# Altium PCB EtherWiz.PcbDoc (part 1 of 2)
Units mm, origin at the board's own origin, x right, y up, seen from the top; angles counter-clockwise.
Board outline 160 x 100 mm, 4 copper layers (Top Layer, GND, 5V, Bottom Layer), stack 1.741 mm thick; 68 components, 149 nets, 452 pads, 231 vias.
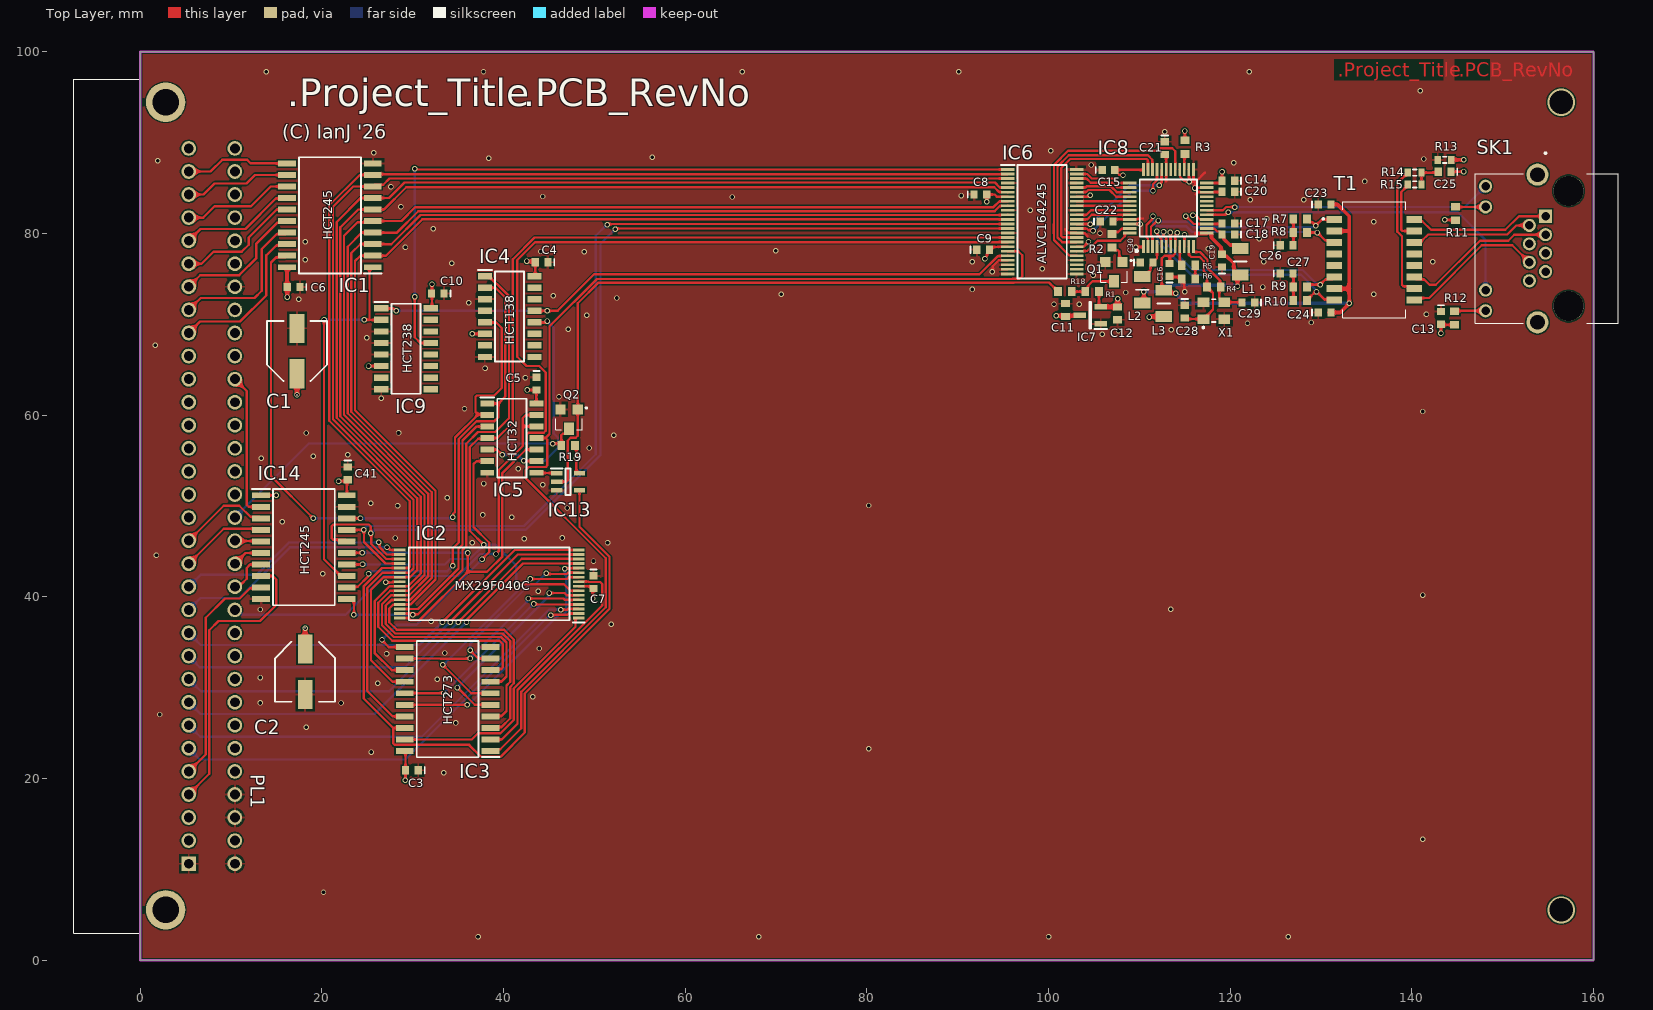
[diagram p0: Top Layer view]
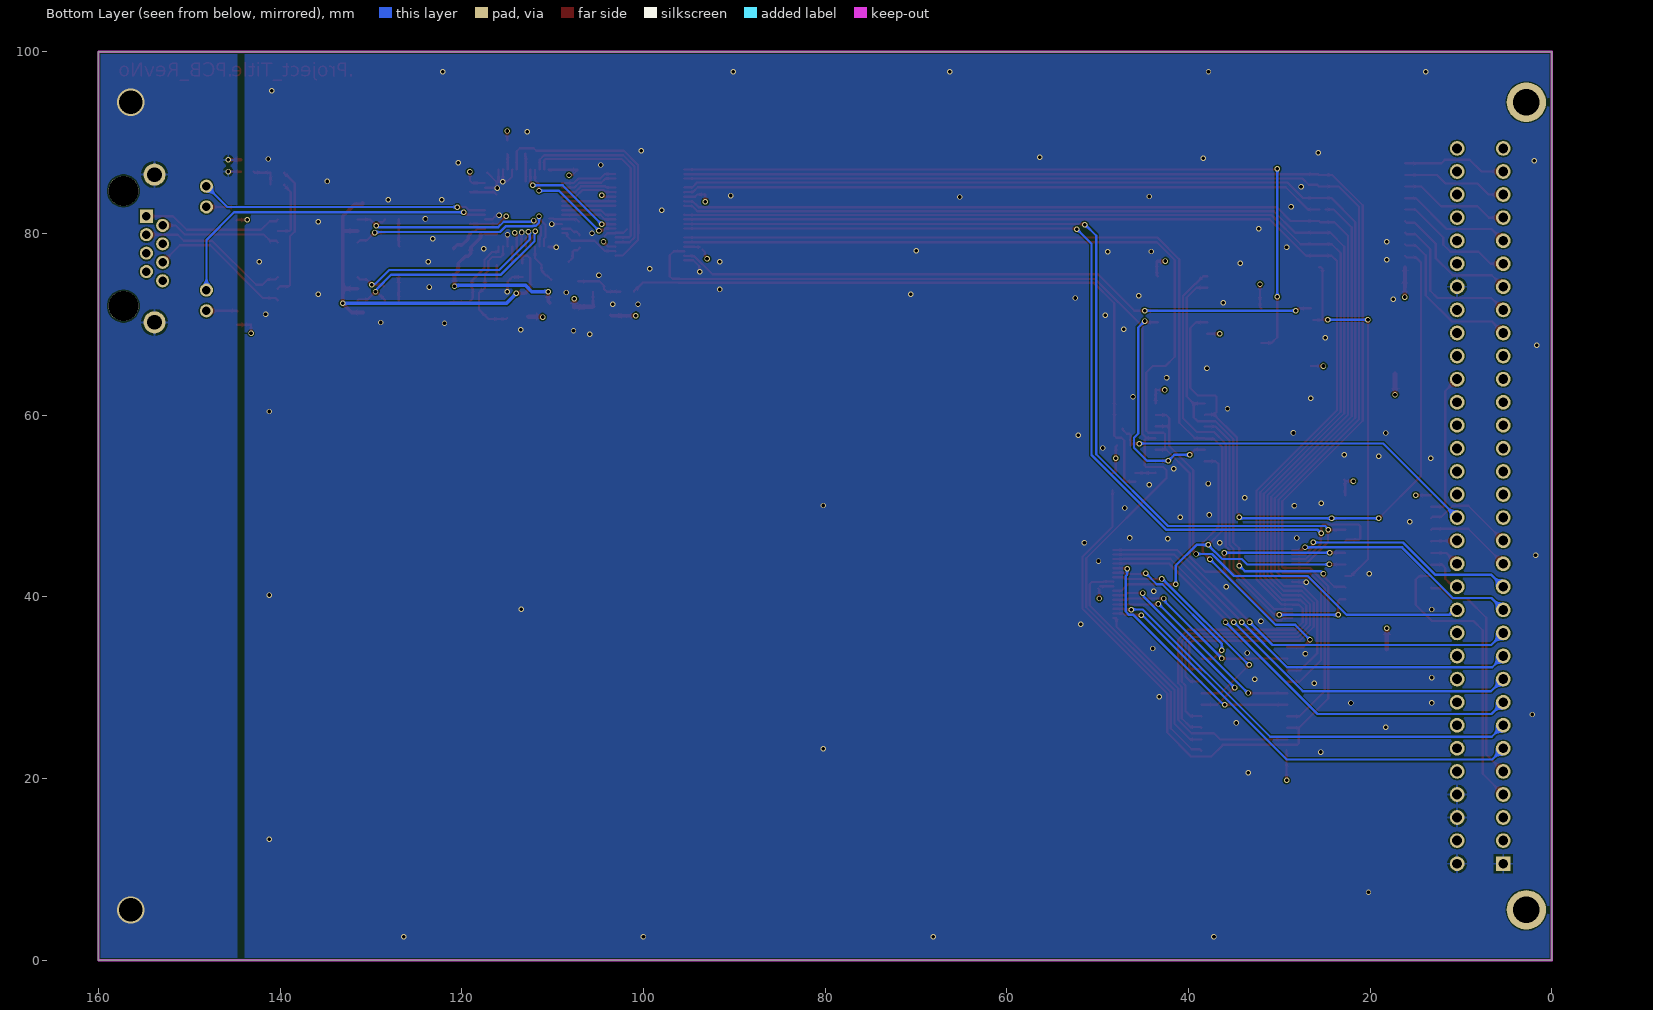
[diagram p1: Bottom Layer view, seen from below]
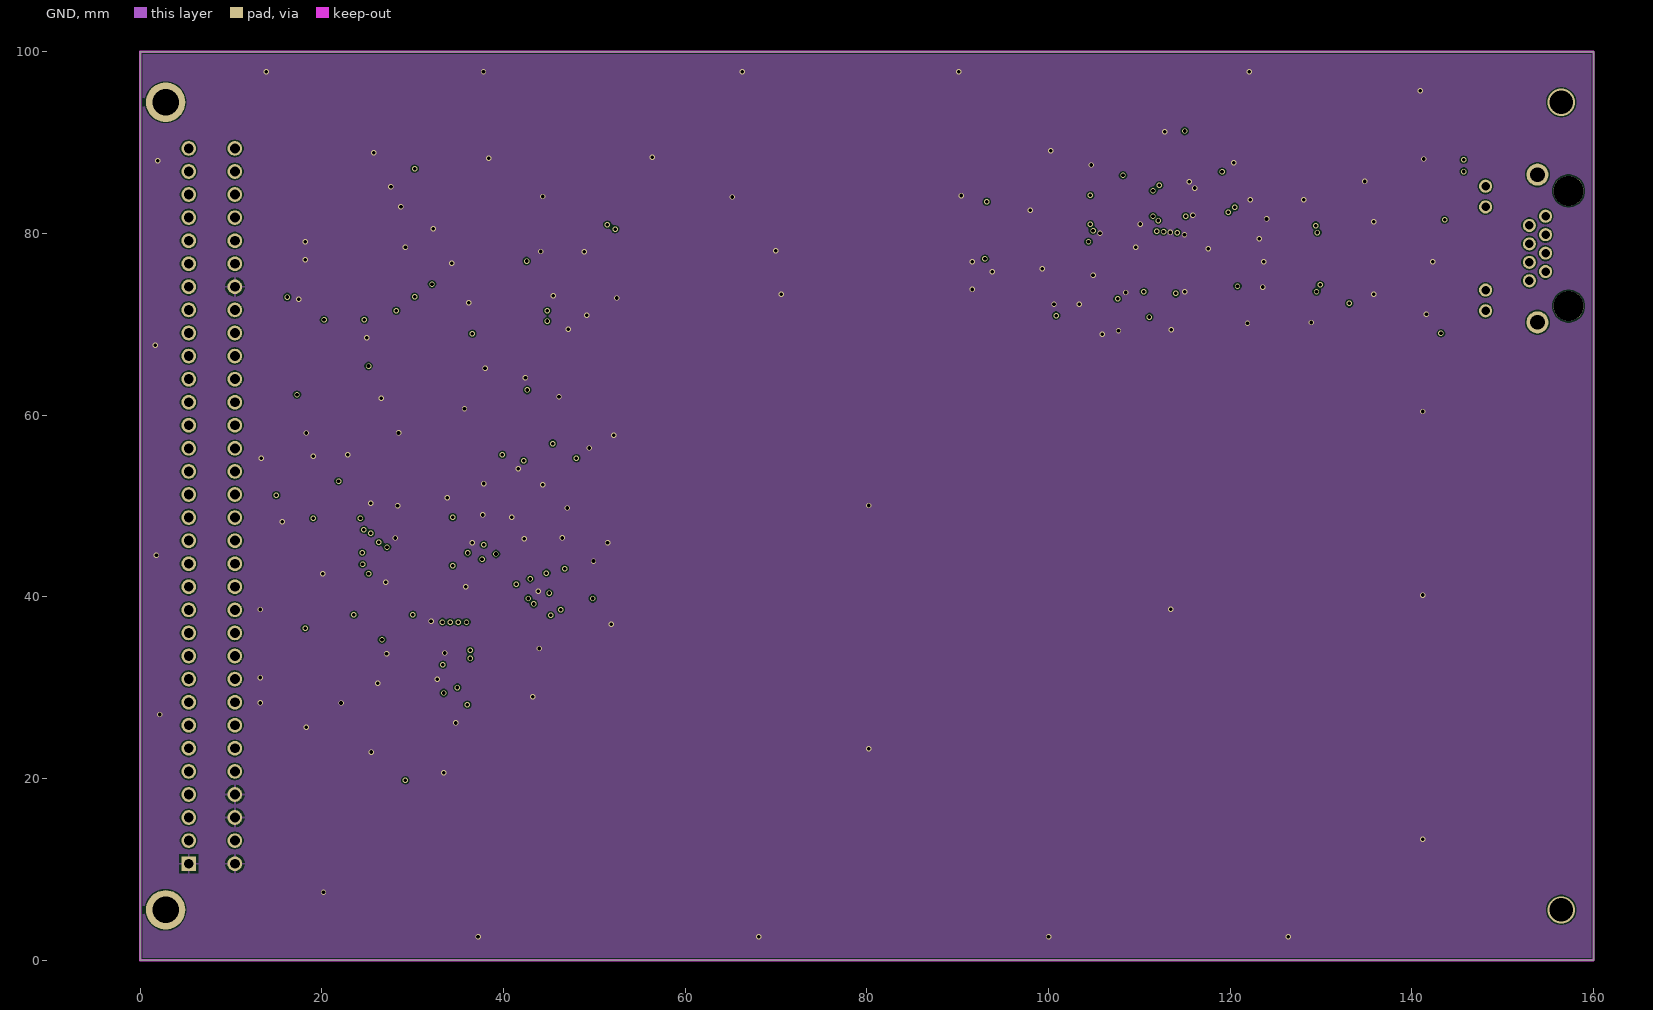
[diagram p2: GND]
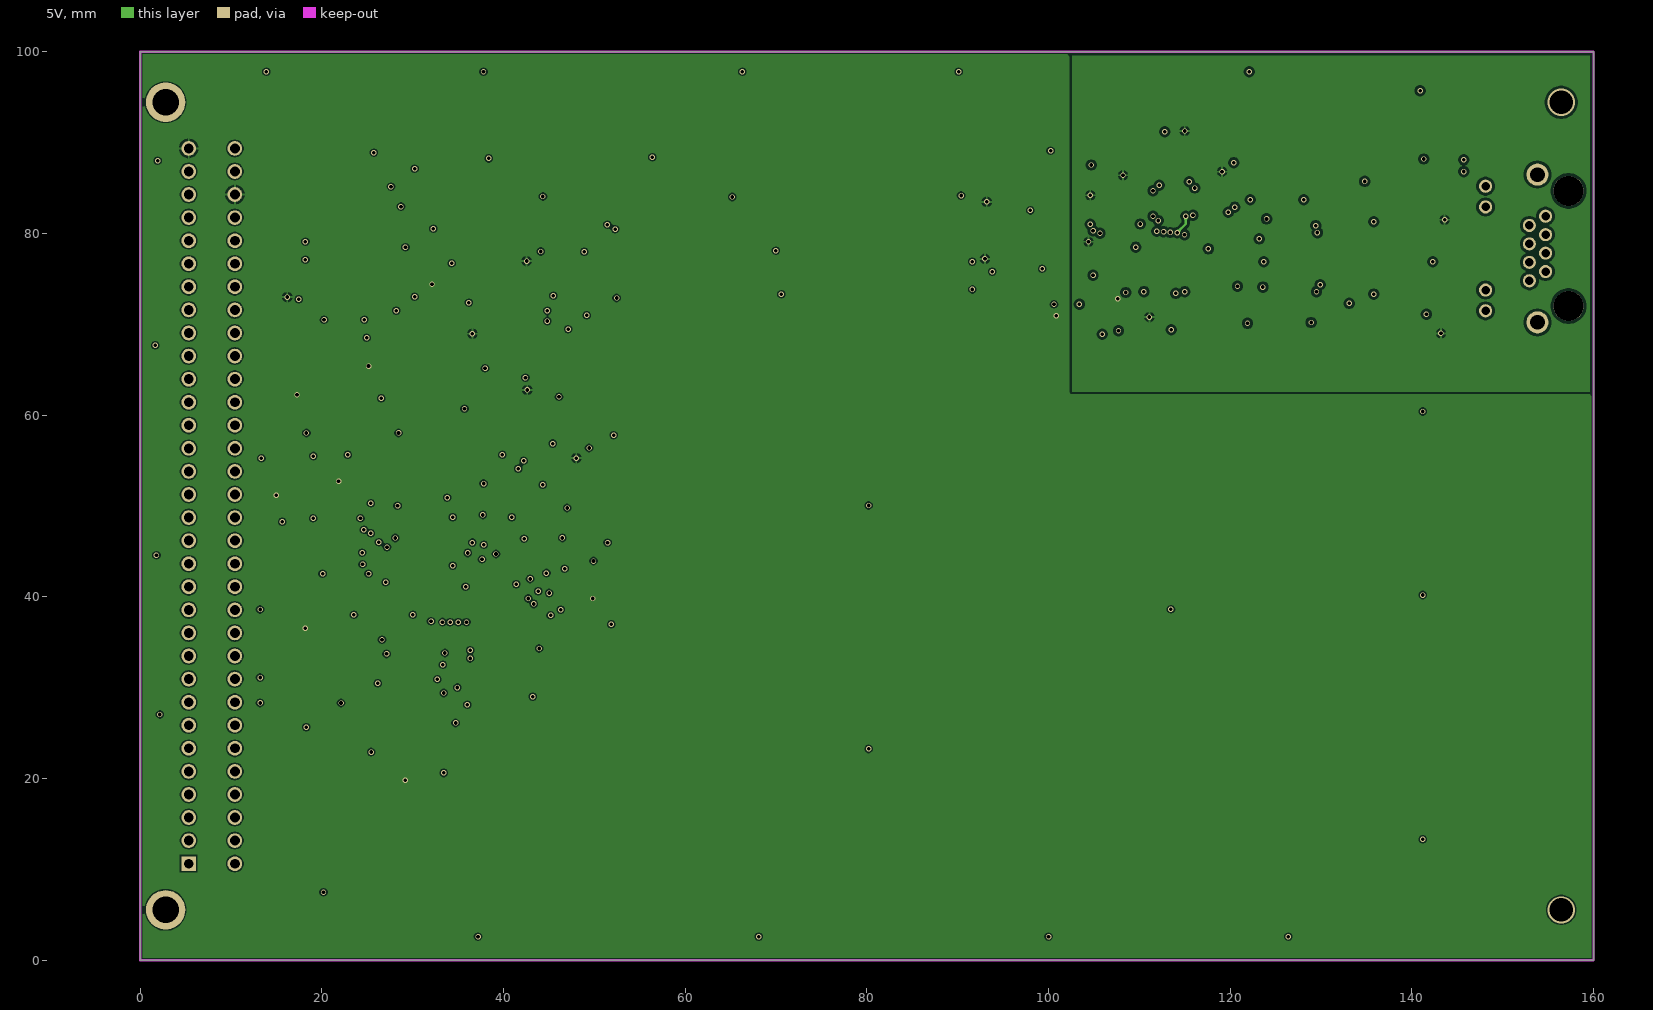
[diagram p3: 5V]
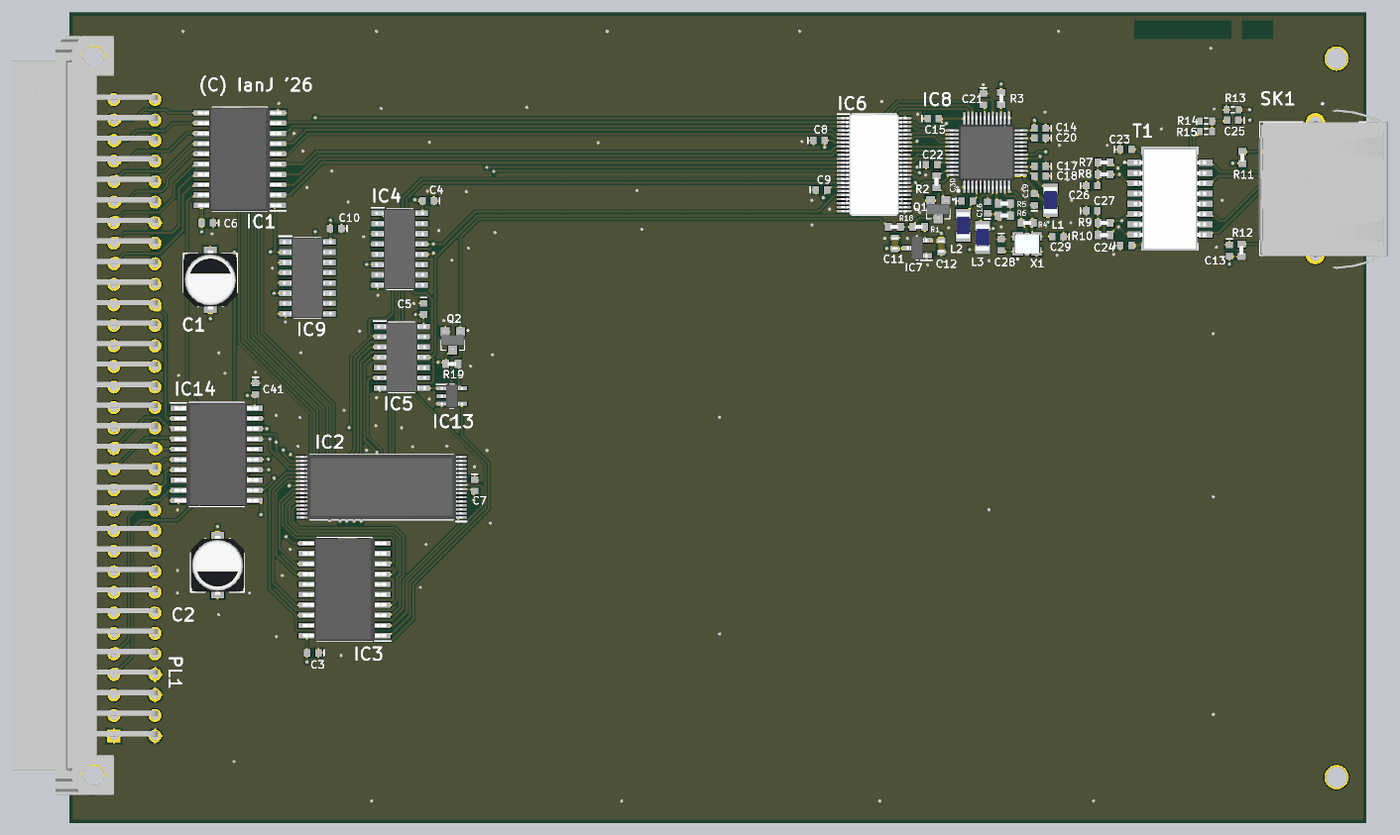
[diagram p5: 3D render of the assembled board from above, using the file's embedded part models]

## Layer stack, top to bottom
Top Solder: solder mask 0.0102, Solder Resist, Dk 3.5
Top Layer: signal copper 0.0356
Dielectric 1: dielectric 0.2, FR-4, Dk 4.8
GND: signal copper 0.035
Dielectric 2: core 1.2, PP-006, Dk 4.1
5V: signal copper 0.035
Dielectric2: dielectric 0.2, FR-4, Dk 4.8
Bottom Layer: signal copper 0.0356
Bottom Solder: solder mask 0.0102, Solder Resist, Dk 3.5

## Board outline
0,0 0,100 160,100 160,0

## Design rules (kind name [scope] priority, off if disabled: settings)
Clearance 3v3_clearance [(InNet('3v3') AND OnLayer('5V'))] p1: gap=0.3 ignorepadtopadclearanceinfootprint=TRUE
Clearance [All] p2: gap=0.15 ignorepadtopadclearanceinfootprint=FALSE
DiffPairsRouting [All] p1: maxlimit=0.254 minlimit=0.15 mostfreqgap=0.254 toplayer_minwidth=0.254 toplayer_maxwidth=0.381 toplayer_prefwidth=0.254 midlayer1_minwidth=0.254 midlayer1_maxwidth=0.381 midlayer1_prefwidth=0.254 midlayer2_minwidth=0.254 midlayer2_maxwidth=0.381 midlayer2_prefwidth=0.254 bottomlayer_minwidth=0.254 bottomlayer_maxwidth=0.381 bottomlayer_prefwidth=0.254 maxuncoupledlength=12.7
HoleSize [All] p1: absolutevalues=TRUE maxlimit=5 minlimit=0.025 maxpercent=80.000 minpercent=20.000
MinimumSolderMaskSliver [All] p1 off: minsoldermaskwidth=0.1
PolygonConnect [All] p1: connectstyle=Relief reliefconductorwidth=0.254 reliefentries=4 polygonreliefangle="90 Angle" airgapwidth=0.254
RoutingVias [All] p1: holewidth=0.4 width=0.6 viastyle="Through Hole" minholewidth=0.4 minwidth=0.6 maxholewidth=0.711 maxwidth=1.27
SilkToSilkClearance [All] p1 off: silktosilkclearance=0.254
SilkToSolderMaskClearance [IsPad] p1 off: minsilkscreentomaskgap=0.254 clearancetoexposedcopper=TRUE
SolderMaskExpansion [All] p1: expansion=0.102 istentingtop=FALSE
SupplyNets "Schematic Supply Nets_5" [InNet('VCC')] p1: voltage=0.000
SupplyNets "Schematic Supply Nets_10" [InNet('GND_CHASS')] p2: voltage=0.000
SupplyNets "Schematic Supply Nets_9" [InNet('1v2a')] p3: voltage=0.000
SupplyNets "Schematic Supply Nets_8" [InNet('1v2o')] p4: voltage=0.000
SupplyNets "Schematic Supply Nets_7" [InNet('3v3a')] p5: voltage=0.000
SupplyNets "Schematic Supply Nets_6" [InNet('1v2d')] p6: voltage=0.000
SupplyNets "Schematic Supply Nets_4" [InNet('3v3')] p7: voltage=0.000
SupplyNets "Schematic Supply Nets_3" [InNet('GND')] p8: voltage=0.000
SupplyNets "Schematic Supply Nets_2" [InNet('-5V')] p9: voltage=0.000
SupplyNets "Schematic Supply Nets_1" [InNet('5V')] p10: voltage=0.000
SupplyNets "Schematic Supply Nets" [InNet('12V')] p11: voltage=0.000
Width [All] p1: maxlimit=0.5 minlimit=0.254 preferedwidth=0.254 midlayer1_maxwidth=0.254 midlayer2_maxwidth=0.254 minimp=50.000000 maximp=50.000000 favimp=50.000000
25 further rules are at their usual default settings.

## Classes and differential pairs
component class EtherWiz: C1 C2 C3 C4 C5 C6 C7 C8 C9 C10 C41 IC1 IC2 IC3 IC4 IC5 IC6 IC9 IC13 IC14 Q2 R19
component class EtherWiz_Sockets: C40 IC10 IC11 IC12 PL1 PL2 PL3 PL4 PL5_SK13 PL6_SK15 PL7_SK19 PL8_SK11 PL9_SK12 PL10_SK16
component class EtherWiz_Controller: C11 C12 C13 C14 C15 C16 C17 C18 C19 C20 C21 C22 C23 C24 C25 C26 C27 C28 C29 C30 IC7 IC8 L1 L2 L3 Q1 R1 R2 R3 R4 R5 R6 R7 R8 R9 R10 R11 R12 R13 R14 R15 R18 SK1 T1 X1
differential pair ETX: +ETX_P -ETX_N
differential pair ERX: +ERX_P -ERX_N
differential pair TX: +TX_P -TX_N
differential pair RX: +RX_P -RX_N

## Components (designator, comment, footprint, x,y, rotation, side; value= is the part's Value field where it differs from the comment)
C1 "EEE-HA1C470AP" EEE1AA101SP 17.272,67.056 r90 top
C2 "EEE-HA1C470AP" EEE1AA101SP 18.161,31.75 r270 top
C3 "100n" CAPC1608L 29.928,20.916 r180 top
C4 "100n" CAPC1608L 44.196,76.835 r180 top
C5 "100n" CAPC1608L 43.619,63.472 r270 top
C6 "100n" CAPC1608L 16.9,74.1 r180 top
C7 "100n" CAPC1608L 49.928,41.616 r270 top
C8 "100n" CAPC1608L 92.5,84.3 r0 top
C9 "100n" CAPC1608L 92.8,78.2 r0 top
C10 "100n" CAPC1608L 32.766,73.406 r180 top
C11 "1uF" CAPC1608X90N 101.872,71.57 r270 top
C12 "1uF" CAPC1608X90N 107.6,71.2 r90 top
C13 "100n" CAPC1608L 143.2,70.7 r270 top
C14 "100n" CAPC1608L 119.8,85.8 r180 top
C15 "100n" CAPC1608L 106.6,87 r0 top
C16 "100n" CAPC1608L 113.3,76 r90 top
C17 "100n" CAPC1608L 119.8,81.1 r180 top
C18 "100nF" CAPC1608L 119.8,79.9 r180 top
C19 "100nF" CAPC1608L 119.1,77 r90 top
C20 "100nF" CAPC1608L 119.8,84.6 r180 top
C21 "100nF" CAPC1608L 112.8,89.4 r270 top
C22 "100nF" CAPC1608L 106.4,81.3 r0 top
C23 "100nF" CAPC1608L 130.4,83.2 r0 top
C24 "100nF" CAPC1608L 130.4,71.3 r0 top
C25 "1nF" CAPC1608L 143.6,86.8 r180 top
C26 "100nF" CAPC1608L 126.2,78.7 r0 top
C27 "100nF" CAPC1608L 126.2,75.6 r0 top
C28 "24pF" CAPC1608L 115,71.4 r270 top
C29 "24pF" CAPC1608L 122,72.4 r180 top
C30 "100nF" CAPC1608L 110.8,76.8 r0 top
C41 "100n" CAPC1608L 22.86,53.594 r270 top
IC1 "SN74HCT245DWR" SOIC127P1030X265-20N 20.9,82 r180 top
IC2 "MX29F040CTI-70G" SOP50P2000X120-32N 38.428,41.416 r180 top locked
IC3 "SN74HCT273DWR" SOIC127P1030X265-20N 33.853,28.751 r180 top locked
IC4 "74HCT138D,653" SOIC127P600X175-16N 40.673,70.851 r0 top locked
IC5 "74HCT32D" SOIC127P600X175-14N 40.919,57.472 r0 top locked
IC6 "74ALVC164245DGG_11" SOP50P810X120-48N 99.3,81.3 r0 top
IC7 "MCP1703AT-3302E_CB" SOT95P255X145-3N 104.6,71 r180 top
IC8 "W6100L" QFP50P900X900X160-48N 113.2,82.8 r90 top locked
IC9 "CD74HCT238M96" SOIC127P600X175-16N 29.268,67.31 r0 top
IC13 "74HCT1G125GV125" SOT95P275X110-5N 47.119,52.672 r0 top
IC14 "SN74HCT245DWR" SOIC127P1030X265-20N 18.034,45.466 r0 top
L1 "782763800" INDC3216X130N 121.1,76.9 r270 top
L2 "782763800" INDC3216X130N 110.3,73.8 r90 top
L3 "782763800" INDC3216X130N 112.7,72.3 r90 top
PL1 "5650945-5" 56509455 5.35,10.625 r270 top locked
Q1 "BC846" SOT-23 107.2,75.8 r180 top
Q2 "BC846" SOT-23 47.219,59.572 r180 top
R1 "100K" RESC1608X50N 104.8,73.6 r0 top
R2 "2K2" RESC1608X50N 107,79.2 r270 top
R3 "2K2" RESC1608X50N 115,89.5 r90 top
R4 "1M" RESC1608X50N 118.2,74.1 r180 top
R5 "12K" RESC1608X50N 115.4,76.5 r180 top
R6 "300R" RESC1608X50N 115.4,75 r0 top
R7 "50R" RESC1608X50N 127.7,81.6 r0 top
R8 "50R" RESC1608X50N 127.7,80.1 r0 top
R9 "50R" RESC1608X50N 127.7,74.1 r0 top
R10 "50R" RESC1608X50N 127.7,72.6 r0 top
R11 "300R" RESC1608X50N 144.8,82.2 r270 top
R12 "300R" RESC1608X50N 144.7,70.7 r270 top
R13 "0R" RESC1608L 143.6,88.1 r0 top
R14 "75R" RESC1608L 140.3,86.7 r180 top
R15 "75R" RESC1608L 140.3,85.4 r180 top
R18 "2K2" RESC1608X50N 101.8,73.6 r180 top
R19 "100K" RESC1608X50N 47.119,56.672 r0 top
SK1 "RJHSE5480" AMPHENOL_RJHSE5480 157.25,78.345 r90 top locked
T1 "PT61017PEL" PT61017PEL 135.2,77.1 r270 top locked
X1 "25MHz" ABM810000MHZ12D2W 118.2,71.5 r0 top

## Footprints (in the part's own frame and the unit in brackets; to place one, negate y for a bottom-side part, rotate by r counter-clockwise, add the part's x,y. Pads: shape width x height; smd on the part's side, far side on the other; paste and mask are expansions set on the pad)
56509455 [mm]
  rect 1.62x1.62 hole 1.08: A1(0,0)
  round 1.62 hole 1.08: A2(-2.54,0) A3(-5.08,0) A4(-7.62,0) A5(-10.16,0) A6(-12.7,0) A7(-15.24,0) A8(-17.78,0) A9(-20.32,0) A10(-22.86,0) A11(-25.4,0) A12(-27.94,0) A13(-30.48,0) A14(-33.02,0) A15(-35.56,0) A16(-38.1,0) A17(-40.64,0) A18(-43.18,0) A19(-45.72,0) A20(-48.26,0) A21(-50.8,0) A22(-53.34,0) A23(-55.88,0) A24(-58.42,0) A25(-60.96,0) A26(-63.5,0) A27(-66.04,0) A28(-68.58,0) A29(-71.12,0) A30(-73.66,0) A31(-76.2,0) A32(-78.74,0) C1(0,5.08) C2(-2.54,5.08) C3(-5.08,5.08) C4(-7.62,5.08) C5(-10.16,5.08) C6(-12.7,5.08) C7(-15.24,5.08) C8(-17.78,5.08) C9(-20.32,5.08) C10(-22.86,5.08) C11(-25.4,5.08) C12(-27.94,5.08) C13(-30.48,5.08) C14(-33.02,5.08) C15(-35.56,5.08) C16(-38.1,5.08) C17(-40.64,5.08) C18(-43.18,5.08) C19(-45.72,5.08) C20(-48.26,5.08) C21(-50.8,5.08) C22(-53.34,5.08) C23(-55.88,5.08) C24(-58.42,5.08) C25(-60.96,5.08) C26(-63.5,5.08) C27(-66.04,5.08) C28(-68.58,5.08) C29(-71.12,5.08) C30(-73.66,5.08) C31(-76.2,5.08) C32(-78.74,5.08)
  round 4.335 hole 2.89: MH1(5.08,-2.54) MH2(-83.82,-2.54)
  silkscreen extent -86.37,-12.65 7.63,-5.5, body extent -86.58,-12.59 7.26,5.43, height 9.55
ABM810000MHZ12D2W [mm]
  rect 1.3x1.05 smd: 1(-1.15,-0.925) 2(1.15,-0.925) 3(1.15,0.925) 4(-1.15,0.925)
  silkscreen extent -1.25,-1.95 0.2,1.25, body extent -1.6,-1.25 1.6,1.25, height 0.8
AMPHENOL_RJHSE5480 [mm]
  rect 1.448x1.448 / inner round 1.448 / far side rect 1.448x1.448 hole 0.94: 1(3.556,2.54)
  round 1.448 hole 0.94: 2(2.54,4.318) 3(1.524,2.54) 4(0.508,4.318) 5(-0.508,2.54) 6(-1.524,4.318) 7(-2.54,2.54) 8(-3.556,4.318) 9(6.858,9.144) 10(4.572,9.144) 11(-4.572,9.144) 12(-6.858,9.144)
  round 2.43 hole 1.62: S1(-8.13,3.43) S2(8.13,3.43)
  round 3.3 hole 3.3 unplated: ""(-6.35,0) ""(6.35,0)
  silkscreen extent -8.25,-5.46 10.6,10.29, body extent -9.93,-5.49 9.78,10.41, height 15.19
CAPC1608L [mm] "Chip Capacitor, Body 1.6x0.8mm, IPC High Density"
  rect 0.8x0.9 smd: 1(-0.7,0) 2(0.7,0)
  silkscreen extent -1.4,-0.35 -1.4,0.35, body extent -0.87,-0.48 0.87,0.48, height 0.85
CAPC1608X90N [mm]
  rect 0.78x0.99 smd: 1(-0.7,0) 2(0.7,0)
  body extent -0.8,-0.41 0.8,0.41, height 0.9
EEE1AA101SP [mm]
  rect 3.2x1.6 smd: 1(-2.5,0) 2(2.5,0)
  silkscreen extent -4.88,-3.3 3.3,3.3, body extent 0,0 0,0
INDC3216X130N [mm]
  rect 1.2x1.8 smd: 1(-1.45,0) 2(1.45,0)
  silkscreen extent 0,-0.7 0,0.7, body extent -1.6,-0.8 1.6,0.8, height 1.3
PT61017PEL [mm]
  rect 0.76x1.7 smd: 1(-4.445,-3.75) 2(-3.175,-3.75) 3(-1.905,-3.75) 4(-0.635,-3.75) 5(0.635,-3.75) 6(1.905,-3.75) 7(3.175,-3.75) 8(4.445,-3.75) 9(4.445,5.05) 10(3.175,5.05) 11(1.905,5.05) 12(0.635,5.05) 13(-0.635,5.05) 14(-1.905,5.05) 15(-3.175,5.05) 16(-4.445,5.05)
  silkscreen extent -6.4,-5.05 6.4,4.1, body extent -6.33,-3.8 6.45,5.1, height 5.14
QFP50P900X900X160-48N [mm]
  rect 1.475x0.3 smd: 1(-4.238,2.75) 2(-4.238,2.25) 3(-4.238,1.75) 4(-4.238,1.25) 5(-4.238,0.75) 6(-4.238,0.25) 7(-4.238,-0.25) 8(-4.238,-0.75) 9(-4.238,-1.25) 10(-4.238,-1.75) 11(-4.238,-2.25) 12(-4.238,-2.75) 25(4.238,-2.75) 26(4.238,-2.25) 27(4.238,-1.75) 28(4.238,-1.25) 29(4.238,-0.75) 30(4.238,-0.25) 31(4.238,0.25) 32(4.238,0.75) 33(4.238,1.25) 34(4.238,1.75) 35(4.238,2.25) 36(4.238,2.75)
  rect 0.3x1.475 smd: 13(-2.75,-4.238) 14(-2.25,-4.238) 15(-1.75,-4.238) 16(-1.25,-4.238) 17(-0.75,-4.238) 18(-0.25,-4.238) 19(0.25,-4.238) 20(0.75,-4.238) 21(1.25,-4.238) 22(1.75,-4.238) 23(2.25,-4.238) 24(2.75,-4.238) 37(2.75,4.238) 38(2.25,4.238) 39(1.75,4.238) 40(1.25,4.238) 41(0.75,4.238) 42(0.25,4.238) 43(-0.25,4.238) 44(-0.75,4.238) 45(-1.25,4.238) 46(-1.75,4.238) 47(-2.25,4.238) 48(-2.75,4.238)
  silkscreen extent -4.85,-3.15 3.15,3.62, body extent -4.5,-4.5 4.5,4.5, height 1.6
RESC1608L [mm] "Chip Resistor, Body 1.6x0.8mm, IPC High Density"
  rect 0.7x0.9 smd: 1(-0.75,0) 2(0.75,0)
  silkscreen extent -0.2,-0.35 0.2,0.35, body extent -0.8,-0.41 0.8,0.41, height 0.45
RESC1608X50N [mm]
  rect 0.85x1 smd: 1(-0.75,0) 2(0.75,0)
  body extent -0.5,-0.25 0.5,0.25, height 0.35
SOIC127P600X175-14N [mm]
  rect 1.525x0.65 smd: 1(-2.712,3.81) 2(-2.712,2.54) 3(-2.712,1.27) 4(-2.712,0) 5(-2.712,-1.27) 6(-2.712,-2.54) 7(-2.712,-3.81) 8(2.712,-3.81) 9(2.712,-2.54) 10(2.712,-1.27) 11(2.712,0) 12(2.712,1.27) 13(2.712,2.54) 14(2.712,3.81)
  silkscreen extent -3.47,-4.33 1.6,4.48, body extent -3,-4.33 3,4.33, height 1.75
SOIC127P600X175-16N [mm]
  rect 1.55x0.7 smd: 1(-2.725,4.445) 2(-2.725,3.175) 3(-2.725,1.905) 4(-2.725,0.635) 5(-2.725,-0.635) 6(-2.725,-1.905) 7(-2.725,-3.175) 8(-2.725,-4.445) 9(2.725,-4.445) 10(2.725,-3.175) 11(2.725,-1.905) 12(2.725,-0.635) 13(2.725,0.635) 14(2.725,1.905) 15(2.725,3.175) 16(2.725,4.445)
  silkscreen extent -3.5,-4.95 1.6,5.15, body extent -3,-4.95 3,4.95, height 1.75
SOIC127P1030X265-20N [mm]
  rect 1.95x0.65 smd: 1(-4.725,5.715) 2(-4.725,4.445) 3(-4.725,3.175) 4(-4.725,1.905) 5(-4.725,0.635) 6(-4.725,-0.635) 7(-4.725,-1.905) 8(-4.725,-3.175) 9(-4.725,-4.445) 10(-4.725,-5.715) 11(4.725,-5.715) 12(4.725,-4.445) 13(4.725,-3.175) 14(4.725,-1.905) 15(4.725,-0.635) 16(4.725,0.635) 17(4.725,1.905) 18(4.725,3.175) 19(4.725,4.445) 20(4.725,5.715)
  silkscreen extent -5.7,-6.4 3.4,6.4, body extent -5.16,-6.4 5.16,6.4, height 1.75
SOP50P810X120-48N [mm]
  rect 1.475x0.3 smd: 1(-3.788,5.75) 2(-3.788,5.25) 3(-3.788,4.75) 4(-3.788,4.25) 5(-3.788,3.75) 6(-3.788,3.25) 7(-3.788,2.75) 8(-3.788,2.25) 9(-3.788,1.75) 10(-3.788,1.25) 11(-3.788,0.75) 12(-3.788,0.25) 13(-3.788,-0.25) 14(-3.788,-0.75) 15(-3.788,-1.25) 16(-3.788,-1.75) 17(-3.788,-2.25) 18(-3.788,-2.75) 19(-3.788,-3.25) 20(-3.788,-3.75) 21(-3.788,-4.25) 22(-3.788,-4.75) 23(-3.788,-5.25) 24(-3.788,-5.75) 25(3.788,-5.75) 26(3.788,-5.25) 27(3.788,-4.75) 28(3.788,-4.25) 29(3.788,-3.75) 30(3.788,-3.25) 31(3.788,-2.75) 32(3.788,-2.25) 33(3.788,-1.75) 34(3.788,-1.25) 35(3.788,-0.75) 36(3.788,-0.25) 37(3.788,0.25) 38(3.788,0.75) 39(3.788,1.25) 40(3.788,1.75) 41(3.788,2.25) 42(3.788,2.75) 43(3.788,3.25) 44(3.788,3.75) 45(3.788,4.25) 46(3.788,4.75) 47(3.788,5.25) 48(3.788,5.75)
  silkscreen extent -4.52,-6.25 2.7,6.25, body extent -4.06,-6.25 4.06,6.25, height 1
SOP50P2000X120-32N [mm]
  rect 1.3x0.3 smd: 1(-9.85,3.75) 2(-9.85,3.25) 3(-9.85,2.75) 4(-9.85,2.25) 5(-9.85,1.75) 6(-9.85,1.25) 7(-9.85,0.75) 8(-9.85,0.25) 9(-9.85,-0.25) 10(-9.85,-0.75) 11(-9.85,-1.25) 12(-9.85,-1.75) 13(-9.85,-2.25) 14(-9.85,-2.75) 15(-9.85,-3.25) 16(-9.85,-3.75) 17(9.85,-3.75) 18(9.85,-3.25) 19(9.85,-2.75) 20(9.85,-2.25) 21(9.85,-1.75) 22(9.85,-1.25) 23(9.85,-0.75) 24(9.85,-0.25) 25(9.85,0.25) 26(9.85,0.75) 27(9.85,1.25) 28(9.85,1.75) 29(9.85,2.25) 30(9.85,2.75) 31(9.85,3.25) 32(9.85,3.75)
  silkscreen extent -10.5,-4 8.85,4.25, body extent -10,-4 10,4, height 1.2
SOT95P255X145-3N [mm]
  rect 1.4x0.6 smd: 1(-1.15,0.95) 2(-1.15,-0.95) 3(1.15,0)
  silkscreen extent -1.85,-1.45 0.1,1.5, body extent -1.28,-1.45 1.28,1.45, height 1.45
SOT95P275X110-5N [mm]
  rect 1.25x0.5 smd: 1(-1.25,0.95) 2(-1.25,0) 3(-1.25,-0.95) 4(1.25,-0.95) 5(1.25,0.95)
  silkscreen extent -1.88,-1.45 0.28,1.45, body extent -1.38,-1.45 1.38,1.45, height 1.1
SOT-23 [mil]
  rect 44x44 smd: 1(-37.5,-42) 2(37.5,-42)
  rect 44x54 smd: 3(-0.25,42)
  silkscreen extent -79,-52 57,47, body extent -57,-47 57,47, height 40

## Part data
C1 C2: "Capacitor Polarised", Manufacturer_Name=Panasonic, Mouser Part Number=667-EEE-HA1C470AP, Arrow Part Number=EEE-HA1C470AP, Arrow Price/Stock=https://www.arrow.com/en/products/eeeha1c470ap/panasonic?utm_currency=USD&region=europe, Datasheet Link=http://industrial.panasonic.com/cdbs/www-data/pdf/RDE0000/ABA0000C1148.pdf, Height=7.8mm, Manufacturer_Part_Number=EEE-HA1C470AP, Mouser Price/Stock=https://www.mouser.co.uk/ProductDetail/Panasonic/EEE-HA1C470AP?qs=d1CqaRUMZD%2FL5qU1hDRerg%3D%3D
C3 C4 C5 C6 C7 C8 C9 C10 C13 C14 C15 C16 C17 C41: library part CAP_100n_0603_50V_0, "CAP 100nF, 0603, 50V, X7R, 10%", Distributor1 Part No=CL10B104KB8NNNC, Distributor2 Part No=311-1344-2-ND, Manufacturer1=Samsung, Manufacturer2=Yageo, Voltage=50V, ComponentLink1Description=ComponentLinknURL1, ComponentLink1URL=https://media.digikey.com/pdf/Data%20Sheets/Samsung%20PDFs/CL_Series_MLCC_ds.pdf, ComponentLink2Description=ComponentLinknURL2, ComponentLink2URL=https://www.yageo.com/upload/media/product/productsearch/datasheet/mlcc/UPY-GPHC_X7R_6.3V-to-50V_18.pdf, Distributor1=Anglia, Distributor2=Digikey, ManuPart1=CL10B104KB8NNNC, ManuPart2=CC0603KRX7R9BB104
C11 C12: library part CL10A105KP8NNNC, "Capacitor", Manufacturer_Name=SAMSUNG, Mouser Part Number=187-CL10A105KP8NNNC, Arrow Part Number=CL10A105KP8NNNC, Arrow Price/Stock=https://www.arrow.com/en/products/cl10a105kp8nnnc/samsung-electro-mechanics?utm_currency=USD&region=nac, Datasheet Link=https://datasheet.lcsc.com/szlcsc/Samsung-Electro-Mechanics-CL10A105KP8NNNC_C26413.pdf, Height=0.9mm, Manufacturer_Part_Number=CL10A105KP8NNNC, Mouser Price/Stock=https://www.mouser.co.uk/ProductDetail/Samsung-Electro-Mechanics/CL10A105KP8NNNC?qs=349EhDEZ59qtu6tL%2F73n2A%3D%3D
C18 C19 C20 C21 C22 C30: library part 100nF0805, "Capacitor", Arrow Part Number=C2012X7R1H104K125AM, LCSC Part #=C111492, Manufacturer_Name=TDK, Mouser Part Number=810-C2012X7R1H104KT5, Arrow Price/Stock=https://www.arrow.com/en/products/c2012x7r1h104k125am/tdk, Datasheet Link=https://product.tdk.com/info/en/catalog/datasheets/mlcc_commercial_midvoltage_en.pdf, Height=1.45mm, Manufacturer_Part_Number=C2012X7R1H104K125AM, Mouser Price/Stock=https://www.mouser.com/Search/Refine.aspx?Keyword=810-C2012X7R1H104KT5
C23 C24 C26 C27: library part 909-0001-L, "Cap ceramic X7R/X5R 100nF 10% 16V C0603", Disti Part Number=432-210, LCSC Part #=C66501, Manufacturer=EPCOS, Tolerance=0.1, Voltage=16V, Component Type=Standard, Construction=X7R, Cost(£)=0.038, Distributer=Farnell, ManuPart=B37931-K9104-K60, Qualified2ndManu=Yageo, Qualified2ndPart=CC0603KRX7R7BB104, RoHS Compliant=YES
C25: library part 910-0053-L, "Cap ceramic X7R 1nF 10% 2kV C1206", Disti Part Number=1206GC102KAT1A, LCSC Part #=C23631, Manufacturer=AVX, Tolerance=0.1, Voltage=2000V, Component Type=Standard, Construction=X7R, Cost(£)=0.187, Distributer=Anglia, ManuPart=1206GC102KAT1A, RoHS Compliant=YES
C28 C29: library part CAP_10P_0603_50V_0, "CAP 10PF, 0603, 50V, NP0, 10%"
IC1 IC14: "Integrated Circuit", Manufacturer_Name="Texas Instruments", Mouser Part Number=595-SN74HCT245DWR, Arrow Part Number=SN74HCT245DWR, Arrow Price/Stock=https://www.arrow.com/en/products/sn74hct245dwr/texas-instruments?region=nac, Datasheet Link=https://datasheet.datasheetarchive.com/originals/distributors/SFDatasheet-6/sf-000131457.pdf, Height=2.65mm, Manufacturer_Part_Number=SN74HCT245DWR, Mouser Price/Stock=https://www.mouser.co.uk/ProductDetail/Texas-Instruments/SN74HCT245DWR?qs=st7IWvlL5%2FhHLMwvvkYTgw%3D%3D
IC2: "Integrated Circuit", Manufacturer_Name=Macronix, Arrow Part Number=MX29F040CTI-70G, Arrow Price/Stock=https://www.arrow.com/en/products/mx29f040cti-70g/macronix-international?region=nac, Datasheet Link=https://www.macronix.com/Lists/Datasheet/Attachments/7266/MX29F040C,%205V,%204Mb,%20v2.2.pdf, Height=1.2mm, Manufacturer_Part_Number=MX29F040CTI-70G
IC3: "Integrated Circuit", Manufacturer_Name="Texas Instruments", Mouser Part Number=595-SN74HCT273DWR, Arrow Part Number=SN74HCT273DWR, Arrow Price/Stock=https://www.arrow.com/en/products/sn74hct273dwr/texas-instruments, Datasheet Link=https://datasheet.datasheetarchive.com/originals/distributors/Datasheets-36/DSA-718641.pdf, Height=2.65mm, Manufacturer_Part_Number=SN74HCT273DWR, Mouser Price/Stock=https://www.mouser.co.uk/ProductDetail/Texas-Instruments/SN74HCT273DWR?qs=SL3LIuy2dWww%2FZr6up0MdA%3D%3D
IC4: "Integrated Circuit", Manufacturer_Name=Nexperia, Mouser Part Number=771-74HCT138D-T, Arrow Part Number=74HCT138D,653, Arrow Price/Stock=https://www.arrow.com/en/products/74hct138d653/nexperia?region=nac, Datasheet Link=https://assets.nexperia.com/documents/data-sheet/74HC_HCT138.pdf, Height=1.75mm, Manufacturer_Part_Number=74HCT138D,653, Mouser Price/Stock=https://www.mouser.co.uk/ProductDetail/Nexperia/74HCT138D653?qs=P62ublwmbi8MKahyK7iY6g%3D%3D
IC5: "Integrated Circuit", Manufacturer_Name=Toshiba, Mouser Part Number=N/A, Arrow Part Number=74HCT32D, Arrow Price/Stock=https://www.arrow.com/en/products/74hct32d/toshiba?region=nac, Datasheet Link=https://toshiba.semicon-storage.com/info/docget.jsp?did=37176&prodName=74HCT32D, Height=1.75mm, Manufacturer_Part_Number=74HCT32D, Mouser Price/Stock=https://www.mouser.co.uk/ProductDetail/Toshiba/74HCT32D?qs=j%252B1pi9TdxUZqVZos7uP1Yw%3D%3D
IC6: "Integrated Circuit", Arrow Part Number=74ALVC164245DGG:11, Manufacturer_Name=Nexperia, Mouser Part Number=771-74ALVC164245, Arrow Price/Stock=https://www.arrow.com/en/products/74alvc164245dgg11/nexperia?utm_currency=USD&region=nac, Datasheet Link=https://assets.nexperia.com/documents/data-sheet/74ALVC164245.pdf, Height=1.2mm, Manufacturer_Part_Number=74ALVC164245DGG:11, Mouser Price/Stock=https://www.mouser.co.uk/ProductDetail/Nexperia/74ALVC164245DGG11?qs=odJ8N4Y39o4j0ykFPcnqaQ%3D%3D
IC7: "Integrated Circuit", Arrow Part Number=MCP1703AT-3302E/CB, Manufacturer_Name=Microchip, Mouser Part Number=579-MCP1703AT3302ECB, Arrow Price/Stock=https://www.arrow.com/en/products/mcp1703at-3302ecb/microchip-technology?region=nac, Datasheet Link=http://uk.rs-online.com/web/p/products/7709509, Height=1.45mm, Manufacturer_Part_Number=MCP1703AT-3302E/CB, Mouser Price/Stock=https://www.mouser.co.uk/ProductDetail/Microchip-Technology/MCP1703AT-3302E-CB?qs=PZkJWYMe7leeY97bgTp%252B9w%3D%3D
IC8: "Integrated Circuit", Manufacturer_Name="WIZnet Inc", Mouser Part Number=950-W6100L, Datasheet Link=https://eu.mouser.com/datasheet/2/443/w6100_ds_v104e-1994614.pdf, Height=1.6mm, Manufacturer_Part_Number=W6100L, Mouser Price/Stock=https://www.mouser.co.uk/ProductDetail/WIZnet/W6100L?qs=pUKx8fyJudARLmbJE2EKlA%3D%3D
IC9: "Integrated Circuit", Manufacturer_Name="Texas Instruments", Mouser Part Number=595-CD74HCT238M96, Datasheet Link=http://www.ti.com/lit/gpn/cd74hct238, Height=1.75mm, Manufacturer_Part_Number=CD74HCT238M96, Mouser Price/Stock=https://www.mouser.co.uk/ProductDetail/Texas-Instruments/CD74HCT238M96?qs=xFfolx0DHx1u%2Fks4%2FbIqqQ%3D%3D
IC13: "Integrated Circuit", Manufacturer_Name=Nexperia, Datasheet Link=https://assets.nexperia.com/documents/data-sheet/74HC_HCT1G125.pdf, Height=1.1mm, Manufacturer_Part_Number=74HCT1G125GV125
L1 L2 L3: library part 74279215, "Inductor", Manufacturer_Name="Wurth Elektronik", Mouser Part Number=710-782763800, Datasheet Link=http://componentsearchengine.com/Datasheets/1/74279215.pdf, Height=1.3mm, Manufacturer_Part_Number=782763800, Mouser Price/Stock=https://www.mouser.co.uk/ProductDetail/Wurth-Elektronik/74279215?qs=5twSNpOB8IC%252BebnV0jQtuw%3D%3D
PL1: "Connector", Manufacturer_Name="TE Connectivity", Mouser Part Number=571-5650945-5, Arrow Part Number=5650945-5, Arrow Price/Stock=https://www.arrow.com/en/products/5650945-5/te-connectivity, Datasheet Link=https://www.te.com/commerce/DocumentDelivery/DDEController?Action=showdoc&DocId=Customer+Drawing%7F650473%7FS%7Fpdf%7FEnglish%7FENG_CD_650473_S_baseFilename.pdf%7F5650945-5, Height=11.1mm, Manufacturer_Part_Number=5650945-5, Mouser Price/Stock=https://www.mouser.co.uk/ProductDetail/TE-Connectivity/5650945-5?qs=%2FFe7VTH785B%252B77b5t925bQ%3D%3D
Q1 Q2: library part TRANS_NPN_BC846_0, "Transistor NPN, 65V, 100mA, TO-236AB/SOT23"
R1 R19: library part 920-0030-L, "Resistor 100K 1%  0603"
R2 R3 R18: library part 920-0030-L, "Resistor 2K2 1%  0603", Disti Part Number=2447434, LCSC Part #=C127449, Manufacturer=Multicomp, Power=63mW, Tolerance=0.01, Component Type=Standard, Construction="Thick Film", Cost(£)=0.025, Distributer=Farnell, ManuPart=MCWR06X75R0FTL, RoHS Compliant=YES
R4: library part 920-0030-L, "Resistor 1M 1%  0603", Disti Part Number=2447434, LCSC Part #=C127449, Manufacturer=Multicomp, Power=63mW, Tolerance=0.01, Component Type=Standard, Construction="Thick Film", Cost(£)=0.025, Distributer=Farnell, ManuPart=MCWR06X75R0FTL, RoHS Compliant=YES
R5: library part 920-0030-L, "Resistor 12K 1%  0603", Disti Part Number=2447434, LCSC Part #=C127449, Manufacturer=Multicomp, Power=63mW, Tolerance=0.01, Component Type=Standard, Construction="Thick Film", Cost(£)=0.025, Distributer=Farnell, ManuPart=MCWR06X75R0FTL, RoHS Compliant=YES
R6: library part 920-0030-L, "Resistor 300R 1%  0603", Disti Part Number=2447434, LCSC Part #=C127449, Manufacturer=Multicomp, Power=63mW, Tolerance=0.01, Component Type=Standard, Construction="Thick Film", Cost(£)=0.025, Distributer=Farnell, ManuPart=MCWR06X75R0FTL, RoHS Compliant=YES
R7 R8 R9 R10: library part 920-0030-L, "Resistor 50R 1%  0603", Disti Part Number=2447434, LCSC Part #=C127449, Manufacturer=Multicomp, Power=63mW, Tolerance=0.01, Component Type=Standard, Construction="Thick Film", Cost(£)=0.025, Distributer=Farnell, ManuPart=MCWR06X75R0FTL, RoHS Compliant=YES
R11 R12: library part 920-0030-L, "Resistor 300R 1%  0603"
R13: library part 920-0001-L, "Resistor 0R0 1A Max 0603", Disti Part Number=923-3130, LCSC Part #=C844718, Manufacturer=Vishay, Component Type=Standard, Construction="Thick Film", Cost(£)=0.056, Distributer=Farnell, ManuPart=CRCW06030000Z0EA, Qualified2ndManu=Yageo, Qualified2ndPart=RC0603JR-070RL, RoHS Compliant=YES
R14 R15: library part 920-0030-L, "Resistor 75R 1%  0603", Disti Part Number=2447434, LCSC Part #=C127449, Manufacturer=Multicomp, Power=63mW, Tolerance=0.01, Component Type=Standard, Construction="Thick Film", Cost(£)=0.025, Distributer=Farnell, ManuPart=MCWR06X75R0FTL, RoHS Compliant=YES
SK1: "Ethernet socket - through hole", Disti Part Number=2709018, Manufacturer=Amphenol, Distributer=Farnell, ManuPart=RJHSE-5480
T1: "Transformer", Disti Part Number=652-PT61017PEL, LCSC Part #=C124001, Manufacturer=Bourns, Arrow Price/Stock=https://www.arrow.com/en/products/pt61017pel/bourns?region=europe, Datasheet Link=http://www.bourns.com/docs/Product-Datasheets/pt61017pel.pdf, Distributer=Mouser, Height=5mm, ManuPart=PT61017PEL, Mouser Price/Stock=https://www.mouser.co.uk/ProductDetail/Bourns/PT61017PEL?qs=0rbOLB9uh%252BASY8PB9lbWrQ%3D%3D
X1: library part ABM8-25.000MHZ-D2X-T, "Crystal or Oscillator", Manufacturer_Name=ABRACON, Mouser Part Number=815-ABM825MHZD2XT, Arrow Part Number=ABM8-25.000MHZ-D2X-T, Arrow Price/Stock=https://www.arrow.com/en/products/abm8-25.000mhz-d2x-t/abracon?region=nac, Datasheet Link=https://abracon.com/Resonators/abm8.pdf, Height=0.8mm, Manufacturer_Part_Number=ABM8-25.000MHZ-D2X-T, Mouser Price/Stock=https://www.mouser.co.uk/ProductDetail/ABRACON/ABM8-25.000MHZ-D2X-T?qs=XeJtXLiO41RuPiM7CXbPRQ%3D%3D

## Via types
v1: diameter 0.6, hole 0.4, Top Layer to Bottom Layer, tented both sides, 229 vias
v2: diameter 3, hole 2.6, Top Layer to Bottom Layer, 2 vias

## Nets (pads, with @x,y where several pads share a name; then routed paths per layer and width w, separated by ;. In a path a pad name is that pad's centre, name@x,y a point inside that pad or via, vN(x,y) a via of type N, cw(c..) or ccw(c..) an arc to the next point about the centre after c; other vN are vias at no path point)
1v2a: C30.2 IC8.4 L2.2 | length 4.5
  Top Layer w0.254: L2.2@110.15,74.9 110.623,75.373 110.723,75.373 111.073,75.723 111.073,75.823 111.227,75.977 111.227,76.549 111.95,77.272 IC8.4@111.95,78.562
1v2d: C19.2 C20.2 C21.2 C22.2 IC8.13 IC8.22 IC8.31 IC8.45 L1.2 L2.1 | length 30
  Top Layer w0.254: C22.2@107.1,81.292 107.373,81.565 IC8.45@108.947,81.565 ; IC8.45@108.962,81.55 108.985,81.573 109.823,81.573 109.891,81.641 110.371,81.641 ; 112.95,85.75 IC8.31@112.95,87.038 112.95,88.45 113,88.5 C21.2@113,88.8 ; 116.2,84.3 116.216,84.3 116.466,84.55 IC8.22@117.438,84.55 119.05,84.55 C20.2@119.1,84.6
  Top Layer w0.4: L2.1@110.3,72.35 110.5,72.55 v1(110.5,73.6) ; 116.198,80.002 IC8.13@117.39,80.002 ; IC8.13@117.932,80 117.932,79.537 119.003,78.466 119.003,77.797 119.3,77.5 119.6,77.5 120.384,76.716 120.384,75.85 120.784,75.45 L1.2@120.984,75.45 ; v1(120.8,74.2) L1.2@120.8,75.45
  Bottom Layer w0.4: v1(110.5,73.6) 112.287,73.6 112.987,74.3 120.646,74.3 120.746,74.2 v1(120.8,74.2)
1v2o: C18.2 IC8.14 L1.1 | length 4.6
  Top Layer w0.254: IC8.14@117.438,80.55 117.461,80.527 118.273,80.527 118.577,80.223 118.678,80.223 118.827,80.223 119.1,79.95 C18.2@119.1,79.9
  Top Layer w0.4: C18.2@119.1,79.9 119.3,79.7 119.3,79.4 119.951,78.749 120.501,78.749 L1.1@120.9,78.35
3v3: C12.2 C13.2 C14.2 C15.2 IC6.31 IC6.42 IC7.2 IC8.24 IC8.36 L3.1 R1.2 R3.2 R11.2 R12.2 | length 21.2
  Top Layer w0.254: IC6.31@103.088,78.55 103.111,78.573 103.89,78.573 v1(104.4,79.083) ; IC6.42@103.088,84.05 104.356,84.05 104.506,84.2 v1(104.6,84.2) ; IC7.2@105.55,72 R1.2@105.55,73.6 ; C15.2@107.3,86.95 107.784,86.466 108.134,86.466 v1(108.2,86.4) ; C15.2@107.3,87 110.427,87 110.45,87.023 IC8.36@110.45,87.038 ; R3.2@115,90.25 v1@115,91.3 ; IC8.24@117.438,85.55 118.85,85.55 C14.2@119.1,85.8 v1(119.1,86.8) ; v1(143.2,69) C13.2@143.2,70 ; C13.2@143.2,69.95 R12.2@144.7,69.95 ; v1(143.6,81.5) 144.75,81.5 R11.2@144.8,81.45
  Top Layer w0.5: IC7.2@105.55,72 105.6,71.95 IC7.2@105.75,71.95 ; IC7.2@105.755,71.925 107.575,71.925 C12.2@107.6,71.9 ; C12.2@107.6,71.872 v1(107.6,72.8) ; v1(111.1,70.8) 111.127,70.8 111.177,70.85 L3.1@112.7,70.85
  other v1: 114.988,91.281
3v3a: C16.2 C17.2 C23.2 C24.2 IC8.8 IC8.15 L3.2 T1.2 T1.7 | length 54.5
  Top Layer w0.254: L3.2@112.7,73.75 112.469,73.981 112.469,77.258 112.759,77.547 112.991,77.547 113.35,77.548 ; C16.2@113.35,76.7 113.35,77.548 ; v1(114.155,80.097) 114.155,80.003 113.95,79.799 IC8.8@113.95,78.562 113.927,78.539 113.927,77.76 113.715,77.548 113.35,77.548 ; v1(115.1,81.9) 115.129,81.9 115.979,81.05 IC8.15@117.438,81.05 119.05,81.05 C17.2@119.1,81.1
  Top Layer w0.4: L3.2@112.7,73.75 113.05,73.4 v1(114,73.4) ; C24.2@130.868,71.3 132.1,71.3 v1(133.1,72.3) 133.1,73.925 ; C23.2@130.9,83.2 131.8,83.2 133.1,81.9 133.1,80.528 133.1,80.275 133.1,73.925 ; C23.2@130.9,83.4 C23.2@131.1,83.2 ; T1.7@131.45,73.925 133.1,73.925 ; T1.2@131.45,80.275 132.959,80.275
  5V w0.254: v1(114.155,80.097) 115.1,81.042 v1(115.1,81.9)
  Bottom Layer w0.4: v1(114,73.4) 115.1,72.3 v1(133.1,72.3)
5V: C1.1 C2.1 C3.2 C4.2 C5.2 C6.2 C7.2 C8.2 C9.2 C10.2 C11.2 C41.2 IC1.20 IC2.8 IC3.20 IC4.6 IC4.16 IC5.14 IC6.7 IC6.18 IC7.3 IC9.6 IC9.16 IC13.5 IC14.1 IC14.20 PL1.A32 PL1.C30 R19.2 | length 41.1
  Top Layer w0.254: IC14.1@13.309,51.181 v1(14.986,51.181) ; v1(21.844,52.739) 22.705,52.739 22.759,52.793 IC14.20@22.759,51.181 ; C41.2@22.798,52.832 C41.2@22.86,52.894 ; v1(25.146,65.405) IC9.6@26.543,65.405 ; v1(29.205,19.796) IC3.20@29.205,23.099 ; IC9.16@31.993,71.755 32.131,71.893 v1(32.131,74.422) ; v1(36.576,68.961) 36.584,68.953 37.941,68.953 IC4.6@37.948,68.946 ; v1(42.619,62.772) C5.2@43.619,62.772 ; IC4.16@43.398,75.296 43.496,75.394 C4.2@43.496,76.835 ; C5.2@43.619,62.872 C5.2@43.619,62.772 ; IC5.14@43.631,61.282 43.619,61.294 C5.2@43.619,62.772 ; C5.2@43.643,62.772 C5.2@43.619,62.772 ; R19.2@47.869,56.672 48.019,56.522 v1(48.019,55.272) 48.019,53.745 48.142,53.622 IC13.5@48.369,53.622 ; IC2.8@48.278,41.166 C7.2@49.719,41.166 ; v1(49.828,39.816) 49.828,40.816 C7.2@49.928,40.916 ; v1(93,77.2) 93,77.294 93.227,77.521 93.227,77.927 C9.2@93.5,78.2 ; v1(93.2,83.477) C8.2@93.2,84.3 ; C8.2@93.25,84.35 93.319,84.281 94.083,84.281 94.314,84.05 IC6.7@95.512,84.05 ; C9.2@93.8,78.5 94.4,78.5 94.427,78.527 94.781,78.527 95.489,78.527 IC6.18@95.512,78.55
  Top Layer w0.4: IC1.20@16.175,76.285 16.175,74.1 16.2,74.075 v1(16.2,73) ; v1(42.545,76.962) 42.583,76.924 C4.2@43.46,76.924 ; v1(100.838,70.962) 101.763,70.962 C11.2@101.8,70.925 ; C11.2@101.836,70.889 C11.2@101.8,70.925 ; IC7.3@103.585,71.003 103.518,70.935 101.81,70.935 C11.2@101.8,70.925
  Top Layer w0.5: v1(17.272,62.256) C1.1@17.272,64.556 ; C2.1@18.161,34.25 v1(18.161,36.55)
12V: PL1.C32
-5V: PL1.C2
/BL: PL1.C25
/ECON: 
/EFIQ: 
/IOGT: PL1.C23
/IORQ: PL1.C24
/MS: PL1.C6
/PFIQ: PL1.C17
/PIRQ: PL1.C16 Q2.3 R19.1 | length 41.7
  Top Layer w0.254: v1(45.419,56.872) 46.169,56.872 R19.1@46.369,56.672 46.369,57.798 46.518,57.946 46.794,57.946 47.225,58.378 Q2.3@47.225,58.505
  Bottom Layer w0.254: PL1.C16@10.43,48.725 18.577,56.872 v1(45.419,56.872)
/PRE_IORD: IC14.5 PL1.C15 | length 2.9
  Top Layer w0.254: PL1.C15@10.43,46.185 10.472,46.143 13.267,46.143 IC14.5@13.309,46.101
/PS: IC14.2 PL1.C22 | length 16
  Top Layer w0.254: PL1.C22@10.43,63.965 11.741,62.654 11.741,50.123 11.953,49.911 IC14.2@13.309,49.911
/PWE_IOWR: IC14.6 PL1.C14 | length 3.4
  Top Layer w0.254: PL1.C14@10.43,43.645 11.616,44.831 IC14.6@13.309,44.831
/RST: IC5.12 IC5.13 PL1.C12 | length 51.1
  Top Layer w0.254: v1(39.174,44.716) 39.174,44.738 39.474,45.038 39.474,53.952 42.119,56.597 42.119,58.772 ; IC5.12@43.631,58.742 43.601,58.772 42.119,58.772 ; IC5.13@43.631,60.012 42.459,60.012 42.119,59.672 42.119,58.772
  Bottom Layer w0.254: PL1.C12@10.43,38.565 10.728,38.565 11.262,38.031 22.608,38.031 26.868,42.291 34.988,42.291 37.413,44.716 v1(39.174,44.716)
/RST_Buf: 
/S2: 
/S6: PL1.C18
/S7: PL1.C21
/WBE: 
B/PRE_IORD: IC2.32 IC5.10 IC6.17 IC14.15 | length 123.4
  Top Layer w0.254: IC14.15@22.759,44.831 22.777,44.849 24.43,44.849 v1(24.447,44.866) ; IC2.32@28.578,37.666 29.562,37.666 29.789,37.439 30.751,37.439 36.068,42.756 ; v1(36.068,44.831) 36.068,42.756 ; IC5.10@43.631,56.202 42.449,56.202 ; IC6.17@95.512,79.05 56.515,79.05 43.49,79.05 41.529,77.089 41.529,66.421 42.545,65.405 43.942,65.405 44.671,64.676 44.671,58.302 44.442,58.074 42.754,58.074 42.592,57.912 42.592,56.344 42.449,56.202 ; 36.068,42.756 38.184,42.756 39.878,44.45 39.878,53.631 42.449,56.202
  Bottom Layer w0.254: v1(24.447,44.866) 24.455,44.858 36.041,44.858 v1(36.068,44.831)
B/PS: IC1.19 IC4.5 IC5.2 IC14.18 | length 76.6
  Top Layer w0.254: IC1.19@16.175,77.555 15.977,77.357 14.957,77.357 14.4,76.8 14.4,53.291 v1(19.05,48.641) ; IC14.18@22.759,48.641 v1(24.257,48.641) ; v1(34.417,48.768) 34.483,48.834 34.483,49.156 34.671,49.344 34.671,57.537 37.212,60.079 ; IC4.5@37.948,70.216 39.172,70.216 39.803,69.585 39.803,62.98 38.995,62.172 37.068,62.172 36.919,62.023 36.919,60.372 37.212,60.079 ; IC5.2@38.207,60.012 38.14,60.079 37.212,60.079
  Bottom Layer w0.254: v1(19.05,48.641) 34.196,48.641 34.323,48.768 v1(34.417,48.768)
B/PWE_IOWR: IC2.7 IC5.4 IC6.16 IC14.14 | length 120.5
  Top Layer w0.254: IC14.14@22.759,43.561 22.764,43.566 24.484,43.566 v1(24.488,43.57) ; v1(37.846,45.72) 36.299,47.267 36.299,56.492 37.212,57.405 38.14,57.405 IC5.4@38.207,57.472 39.311,57.472 41.015,59.176 41.015,77.146 43.419,79.55 IC6.16@95.512,79.55 ; v1(41.402,41.402) 41.411,41.393 43.889,41.393 46.651,41.393 47.378,40.666 IC2.7@48.278,40.666
  Bottom Layer w0.254: v1(24.488,43.57) 33.537,43.57 34.136,44.169 36.295,44.169 37.733,45.607 37.733,45.701 37.752,45.72 39.124,45.72 41.402,43.442 v1(41.402,41.402)
B/RST: IC3.1 IC5.11 IC6.19 | length 117.9
  Top Layer w0.254: IC3.1@38.578,23.036 38.776,23.234 39.646,23.234 41.948,25.536 41.948,29.536 51.267,38.855 51.267,44.237 42.419,53.085 42.419,53.929 42.793,54.303 44.67,54.303 44.819,54.452 44.819,57.285 44.632,57.472 44.626,57.472 IC5.11@43.631,57.472 ; 44.626,57.479 45.075,57.927 45.075,69.786 50.285,74.996 96.025,74.996 96.033,75.004 96.804,75.004 97.1,75.3 97.1,77.6 96.65,78.05 IC6.19@95.512,78.05
BD0: IC1.11 PL1.A31 | length 11.5
  Top Layer w0.254: PL1.A31@5.35,86.825 7.756,86.825 9.031,88.1 11.799,88.1 12.184,87.715 IC1.11@16.175,87.715
BD1: IC1.12 PL1.A30 | length 11.7
  Top Layer w0.254: PL1.A30@5.35,84.285 6.985,84.285 8.2,85.5 11.7,85.5 12.645,86.445 IC1.12@16.175,86.445
BD2: IC1.13 PL1.A29 | length 12.2
  Top Layer w0.254: PL1.A29@5.35,81.745 6.945,81.745 8.2,83 12.2,83 14.375,85.175 IC1.13@16.175,85.175
BD3: IC1.14 PL1.A28 | length 12.8
  Top Layer w0.254: PL1.A28@5.35,79.205 6.645,80.5 11.6,80.5 14.968,83.868 16.138,83.868 IC1.14@16.175,83.905
BD4: IC1.15 PL1.A27 | length 13.8
  Top Layer w0.254: PL1.A27@5.35,76.665 6.765,76.665 8.1,78 11.2,78 11.95,78.75 11.95,79.55 15.035,82.635 IC1.15@16.175,82.635
BD5: IC1.16 PL1.A26 | length 14.8
  Top Layer w0.254: PL1.A26@5.35,74.125 6.625,75.4 10.9,75.4 12.8,77.3 12.8,78.9 15.067,81.167 15.977,81.167 IC1.16@16.175,81.365
BD6: IC1.17 PL1.A25 | length 17
  Top Layer w0.254: PL1.A25@5.35,71.585 6.665,72.9 12.6,72.9 13.4,73.7 13.4,78.3 15.02,79.92 16,79.92 IC1.17@16.175,80.095
BD7: IC1.18 PL1.A24 | length 17.5
  Top Layer w0.254: PL1.A24@5.35,69.045 6.605,70.3 11,70.3 13.9,73.2 13.9,77.6 14.985,78.685 16.035,78.685 IC1.18@16.175,78.825
BD8: PL1.A23
BD9: PL1.A22
BD10: PL1.A21
BD11: PL1.A20
BD12: PL1.A19
BD13: PL1.A18
BD14: PL1.A17
BD15: PL1.A16
BLA2: IC2.20 IC6.13 IC14.17 | length 107.1
  Top Layer w0.254: IC14.17@22.759,47.371 v1(24.638,47.371) 24.638,46.047 27.019,43.666 IC2.20@28.578,43.666 ; v1(51.435,80.973) 51.529,80.973 51.606,81.05 IC6.13@95.512,81.05
  Bottom Layer w0.254: v1(24.638,47.371) 24.638,47.465 24.811,47.638 24.811,47.64 24.96,47.789 42.265,47.789 50.165,55.689 50.165,79.756 51.382,80.973 v1(51.435,80.973)